# EAGLE board rocket smb (EAGLE 9.6.2)
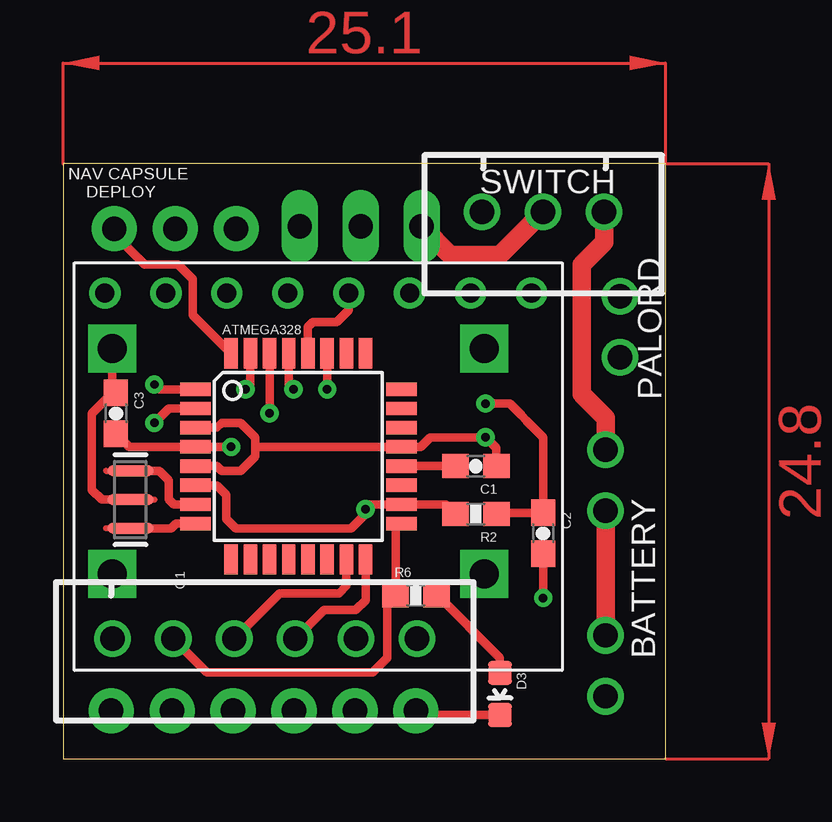
[diagram p0: board, top side]
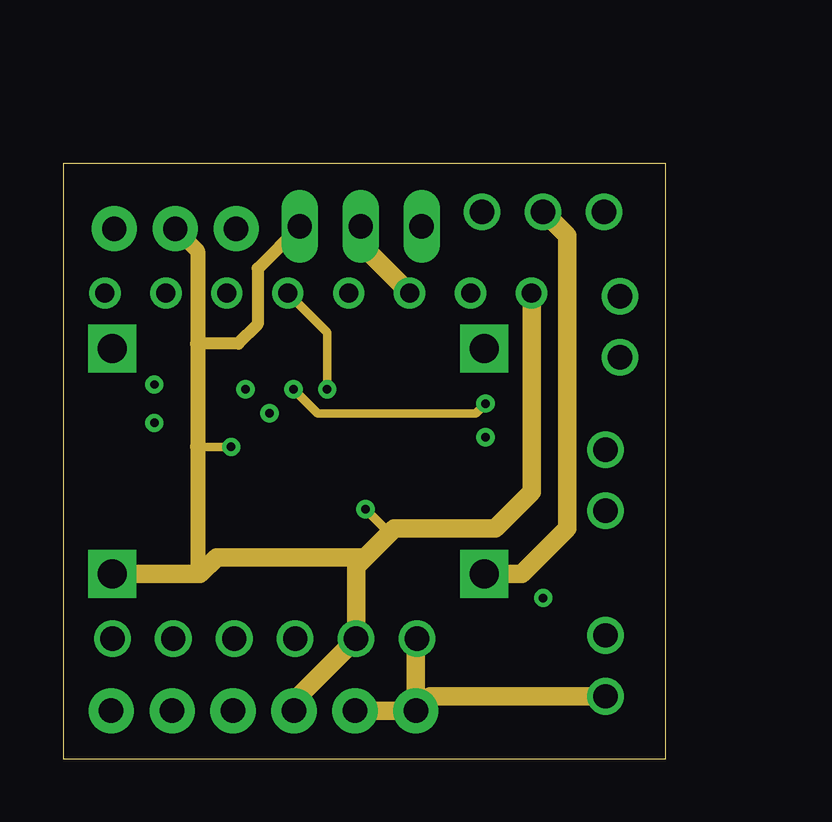
[diagram p1: board, inner layer Route2]
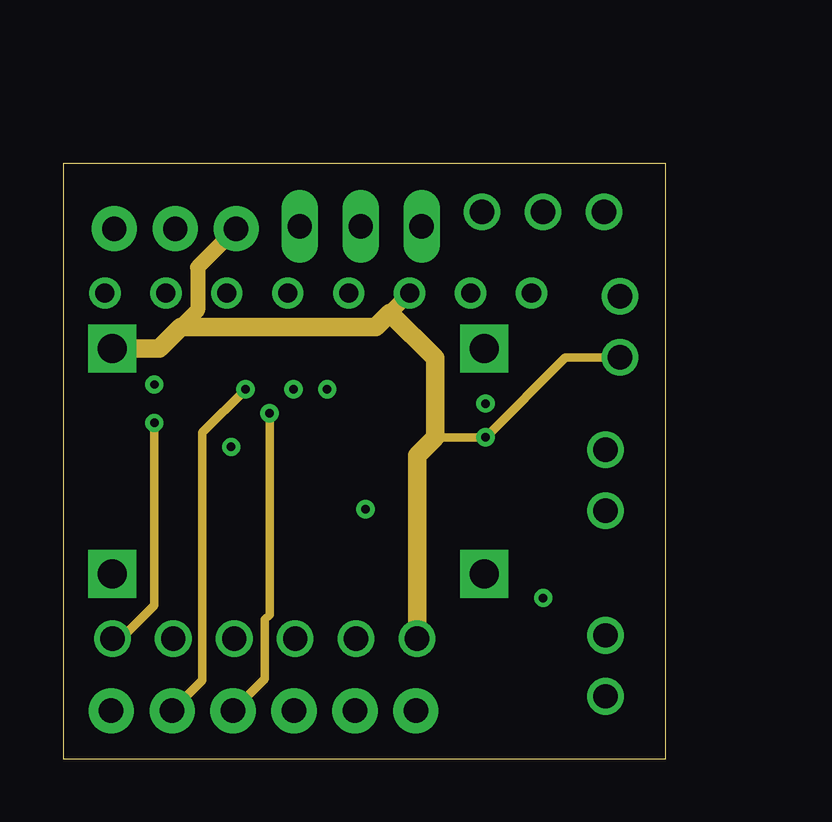
[diagram p2: board, inner layer Route15]
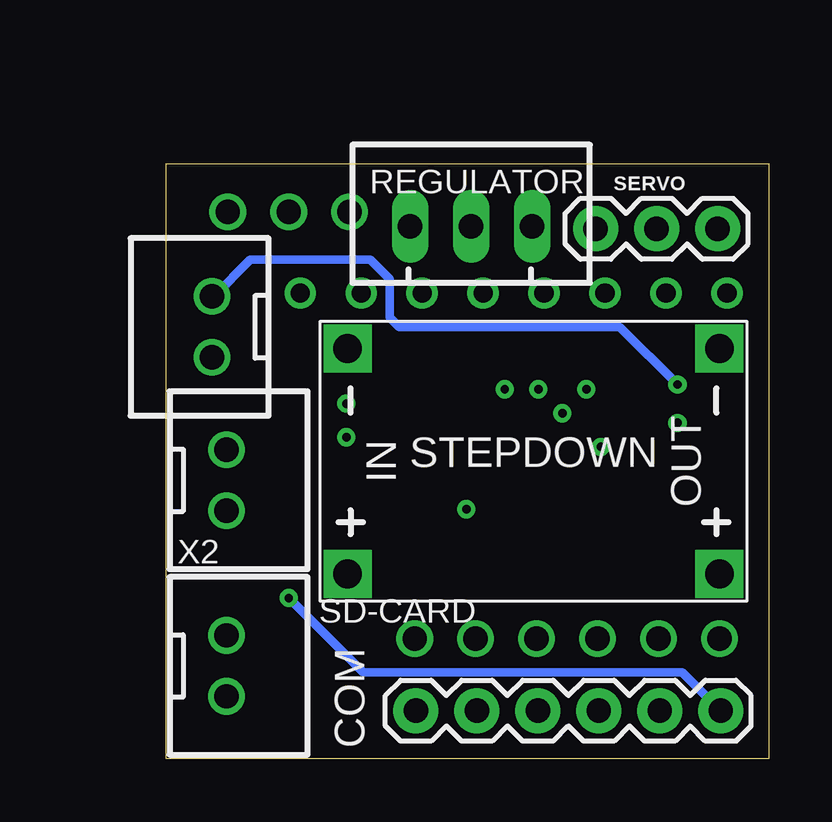
[diagram p3: board, bottom side, seen from below]

Size 25.1 x 24.8 mm. Coordinates in mm from the lower left corner, seen from the top.
Outline: 0,0 25.1,0 25.1,24.8 0,24.8 0,0
Copper layers (1+2*15+16): Top 0.035mm / dielectric 1.08mm / Route2 0.035mm / dielectric 0.15mm / Route15 0.035mm / dielectric 0.2mm / Bottom 0.035mm
Design rules "default *": minimum track width 6mil, minimum drill 0.35mm, track to track 6mil, track to pad 6mil, pad to pad 6mil, via to via 6mil, smd to smd 6mil, copper to edge 40mil, drill to drill 6mil, minimum pad ring 10mil, minimum via ring 8mil, stop-mask expansion 4mil, vias tented up to drill 0mil, thermal gap 10mil
Net classes: 1 vcc: width 0.254 mm

## Footprints (pad centres in the part's own frame; a part is rotated, then mirrored left to right if it is on the bottom)
TQFP32-08 = smd 1.27 x 0.559: 1 -4.293,2.8; 2 -4.293,2; 3 -4.293,1.2; 4 -4.293,0.4; 5 -4.293,-0.4; 6 -4.293,-1.2; 7 -4.293,-2; 8 -4.293,-2.8; 17 4.293,-2.8; 18 4.293,-2; 19 4.293,-1.2; 20 4.293,-0.4; 21 4.293,0.4; 22 4.293,1.2; 23 4.293,2; 24 4.293,2.8 | smd 0.559 x 1.27: 9 -2.8,-4.293; 10 -2,-4.293; 11 -1.2,-4.293; 12 -0.4,-4.293; 13 0.4,-4.293; 14 1.2,-4.293; 15 2,-4.293; 16 2.8,-4.293; 25 2.8,4.293; 26 2,4.293; 27 1.2,4.293; 28 0.4,4.293; 29 -0.4,4.293; 30 -1.2,4.293; 31 -2,4.293; 32 -2.8,4.293
JST-XH-02-PACKAGE-ROUND-PAD = drill 1.016: 1 -1.27,0; 2 1.27,0
0603-CAP = smd 1.1 x 1: 1 -0.85,0; 2 0.85,0
1X06 = drill 1.016 pad 1.88: 1 0,0; 2 2.54,0; 3 5.08,0; 4 7.62,0; 5 10.16,0; 6 12.7,0
0603-LED-ALT1 = smd 1 x 1: A 0,-0.877; C 0,0.877
GY-86 = drill 0.8: 1 1.27,19.05; 2 1.27,16.51; 3 1.27,13.97; 4 1.27,11.43; 5 1.27,8.89; 6 1.27,6.35; 7 1.27,3.81; 8 1.27,1.27
RESONATOR-SMD-1:1 = smd 0.45 x 1.905: 1 -1.2,0; 2 0,0; 3 1.2,0
0603-RES = smd 1.1 x 1: 1 -0.85,0; 2 0.85,0
JST-XH-03-PACKAGE-LONG-PAD = drill 1.016 long: 1 -2.54,0; 2 0,0; 3 2.54,0
JST-XH-06-PACKAGE-ROUND-PAD = drill 1.016: 1 -6.35,0; 2 -3.81,0; 3 -1.27,0; 4 1.27,0; 5 3.81,0; 6 6.35,0
1X03 = drill 1.016 pad 1.88: 1 0,0; 2 2.54,0; 3 5.08,0
DC-DC-STEP-DOWN-MP2307 = drill 1.2 pad 2 square: IN+ -7.747,-4.699; IN- -7.747,4.699; OUT+ 7.747,-4.699; OUT- 7.747,4.699
JST-XH-03-PACKAGE-ROUND-PAD = drill 1.016: 1 -2.54,0; 2 0,0; 3 2.54,0

## Placement (x,y rotation side)
ATMEGA328  ATMEGA328  [TQFP32-08]  9.8,12.6 0 top
BATTERY  JST-XH-02-PIN-ROUND-PAD  [JST-XH-02-PACKAGE-ROUND-PAD]  22.6,11.61 270 bottom
C1  0.1uF  [0603-CAP]  17.2,12.2 180 top
C2  0.1uF  [0603-CAP]  20,9.4 270 top
C3  0.1uF  [0603-CAP]  2.2,14.4 270 top
COM  FTDI Basic  [1X06]  2,2 180 bottom
D3  Green  [0603-LED-ALT1]  18.2,2.7 180 top
MPU  GY-86  [GY-86]  0.47,20.68 270 top
PALORD  JST-XH-02-PIN-ROUND-PAD  [JST-XH-02-PACKAGE-ROUND-PAD]  23.2,18 90 bottom
Q1  8/16/20MHz  [RESONATOR-SMD-1:1]  2.8,10.8 270 top
R2  10K  [0603-RES]  17.2,10.2 180 top
R6  330  [0603-RES]  14.7,6.8 0 top
REGULATOR  JST-XH-03-PIN-LONG-PAD  [JST-XH-03-PACKAGE-LONG-PAD]  12.4,22.2 0 bottom
SD-CARD  JST-XH-06-PIN-ROUND-PAD  [JST-XH-06-PACKAGE-ROUND-PAD]  8.4,5 180 top
SERVO  SERVO  [1X03]  2.13,22.1 180 bottom
STEPDOWN  DC-DC-STEP-DOWN-MP2307  [DC-DC-STEP-DOWN-MP2307]  9.8,12.4 0 bottom
SWITCH  JST-XH-03-PIN-ROUND-PAD  [JST-XH-03-PACKAGE-ROUND-PAD]  20,22.8 180 top
X2  JST-XH-02-PIN-ROUND-PAD  [JST-XH-02-PACKAGE-ROUND-PAD]  22.6,3.87 270 bottom

## Library data of the parts
ATMEGA328 C1-C3 COM R2 R6 = SparkFun
BATTERY PALORD REGULATOR SD-CARD SWITCH X2 = Rembrandt Electronics - JST XH Connectors v1-0
D3 Q1 = Testing
MPU = gy91
SERVO = SparkFun-Electromechanical
STEPDOWN = diy-modules

## Nets
A0: ATMEGA328.23
A1: ATMEGA328.24
A2: ATMEGA328.25
A3: ATMEGA328.26
A6: ATMEGA328.19
A7: ATMEGA328.22
AREF: ATMEGA328.20 C1.2
D2: ATMEGA328.32 SERVO.1
D3: ATMEGA328.1 PALORD.2
D4: ATMEGA328.2 SD-CARD.6
D5: ATMEGA328.9
D6: ATMEGA328.10
D7: ATMEGA328.11
D8: ATMEGA328.12
D9: ATMEGA328.13
D10: ATMEGA328.14
DTR: C2.2 COM.1
GND: ATMEGA328.3 ATMEGA328.5 ATMEGA328.21 C1.1 C3.1 COM.5 COM.6 D3.C MPU.3 PALORD.1 Q1.2 REGULATOR.2 SD-CARD.1 SERVO.3 STEPDOWN.OUT- X2.2
MISO: ATMEGA328.16 SD-CARD.3
MOSI: ATMEGA328.15 SD-CARD.4
N$1: BATTERY.2 X2.1
N$2: BATTERY.1 SWITCH.1
N$3: REGULATOR.1 STEPDOWN.IN+ SWITCH.2
N$7: ATMEGA328.28 MPU.4
N$8: ATMEGA328.27 MPU.5
N$13: D3.A R6.2
N$14: ATMEGA328.8 Q1.3
N$15: ATMEGA328.7 Q1.1
RESET: ATMEGA328.29 C2.1 R2.1
RXI: ATMEGA328.30 COM.3
SCK: ATMEGA328.17 R6.1 SD-CARD.5
TXO: ATMEGA328.31 COM.2
VCC [vcc]: ATMEGA328.4 ATMEGA328.6 ATMEGA328.18 C3.2 COM.4 MPU.1 R2.2 REGULATOR.3 SD-CARD.2 SERVO.2 STEPDOWN.OUT+

## Tracks (layer width: path | path; a pad name or v marks a point on that pad's centre or on a via)
AREF
  Top 0.356: C1.2 ATMEGA328.20
D2
  Top 0.356: ATMEGA328.32 5.4,18.49 5.4,20 4.8,20.6 3.4,20.6 2.13,21.87 SERVO.1
D3  (via drill 0.35)
  Top 0.356: ATMEGA328.1 4,15.4 v3.8,15.6
  Bottom 0.356: v3.8,15.6 6.2,18 15.4,18 15.8,18.4 15.8,20 16.6,20.8 21.6,20.8 23.13,19.27 PALORD.2
D4  (via drill 0.35)
  Top 0.356: ATMEGA328.2 4.4,14.6 v3.8,14
  Route15 0.356: v3.8,14 3.8,6.4 2.4,5 SD-CARD.6
DTR  (via drill 0.35)
  Top 0.356: C2.2 v20,6.7
  Bottom 0.356: v20,6.7 16.9,3.6 3.6,3.6 COM.1
GND  (via drill 0.35)
  Top 0.356: STEPDOWN.OUT- 2.05,15.4 C3.1 2.04,15.25 1.19,14.4 1.19,11.21 1.6,10.8 Q1.2 | C1.1 18.05,12.95 v17.6,13.4 15.3,13.4 14.9,13 ATMEGA328.21 8,13 | ATMEGA328.3 6.4,13.8 6.6,14 7.4,14 8,13.4 8,13 | 8,13 8,12.6 7.4,12 6.6,12 6.4,12.2 ATMEGA328.5 | D3.C 14.88,1.82 COM.6
  Route2 0.762: MPU.3 12.4,21.45 REGULATOR.2 | COM.6 15.3,2.6 X2.2 | COM.6 COM.5 | COM.6 14.7,4.95 SD-CARD.1
  Route15 0.356: 15.5,13.4 v17.6,13.4 20.93,16.73 PALORD.1
  Route15 0.635: SERVO.3 5.6,20.49 5.6,18.7 4.9,18 | 13.61,18.59 MPU.3
  Route15 0.762: STEPDOWN.OUT- 4,17.1 4.9,18 13.03,18 13.61,18.59 15.5,16.7 15.5,13.4 14.75,12.65 SD-CARD.1
MISO
  Top 0.356: SD-CARD.3 10.87,6.2 12.2,6.2 12.6,6.6 ATMEGA328.16
MOSI
  Top 0.356: ATMEGA328.15 11.8,7.2 11.5,6.9 9.03,6.9 SD-CARD.4
N$1
  Top 0.762: X2.1 BATTERY.2
N$2
  Top 0.762: BATTERY.1 22.6,14.2 21.6,15.2 21.6,20.6 22.54,21.54 SWITCH.1
N$3
  Top 0.762: REGULATOR.1 16.14,21 18.2,21 SWITCH.2
  Route2 0.762: SWITCH.2 21,21.8 21,9.6 19.1,7.7 STEPDOWN.IN+
N$7
  Top 0.356: ATMEGA328.28 10.2,18 10.4,18.2 11.4,18.2 11.9,18.7 MPU.4
N$8  (via drill 0.35)
  Top 0.356: ATMEGA328.27 v11,15.4
  Route2 0.356: MPU.5 11,17.77 v11,15.4
N$13
  Top 0.356: R6.2 15.6,6.8 18.2,4.2 D3.A
N$14
  Top 0.356: Q1.3 4.51,9.6 4.71,9.8 ATMEGA328.8
N$15
  Top 0.356: ATMEGA328.7 4.6,10.6 4.4,10.8 4.4,11.6 4,12 Q1.1
RESET  (via drill 0.35)
  Top 0.356: R2.1 18.1,10.25 C2.1 20,13.4 19.3,14.1 19.1,14.3 18.6,14.8 v17.6,14.8 | ATMEGA328.29 9.4,15.6 v9.6,15.4
  Route2 0.356: v9.6,15.4 10.6,14.4 17.2,14.4 v17.6,14.8
RXI  (via drill 0.35)
  Top 0.356: ATMEGA328.30 v8.6,14.4
  Route15 0.356: COM.3 8.4,3.32 8.4,5.8 8.6,6 v8.6,14.4
SCK
  Top 0.356: ATMEGA328.17 13.85,9.56 R6.1 13.5,6.8 13.5,4.2 12.9,3.6 5.99,3.6 SD-CARD.5
TXO  (via drill 0.35)
  Top 0.356: ATMEGA328.31 7.8,15.6 v7.6,15.4
  Route15 0.356: COM.2 5.8,3.26 5.8,13.6 v7.6,15.4
VCC  (via drill 0.35)
  Top 0.356: C3.2 2.75,13 ATMEGA328.4 v7,13 | R2.2 15.95,10.6 ATMEGA328.18 12.8,10.6 v12.6,10.4 12.6,10.2 12,9.6 7.2,9.6 6.8,10 6.8,11 6.4,11.4 ATMEGA328.6
  Route2 0.356: v12.6,10.4 13.4,9.6 13.8,9.6 | v7,13 5.6,13
  Route2 0.508: REGULATOR.3 8.1,20.44 8.1,18.1 7.3,17.3 5.6,17.3
  Route2 0.635: SERVO.2 5.6,21.17 5.6,17.3 5.6,13 5.6,7.7
  Route2 0.762: STEPDOWN.OUT+ 5.6,7.7 5.7,7.7 6.4,8.4 12.4,8.4 12.5,8.3 | MPU.1 19.52,11.12 18,9.6 13.8,9.6 12.5,8.3 | COM.4 9.62,2.41 SD-CARD.2 12.21,8.01 12.5,8.3
(copper drawn outside any net)
  shapes: Top area x2

## Text on the board
tNames: NAV CAPSULE / DEPLOY